# Altium PCB IR emitter.PcbDoc
Units mil, origin at the board's own origin, x right, y up, seen from the top; angles counter-clockwise.
Board outline 614.17 x 2563 mil, 2 copper layers (Top Layer, Bottom Layer); 32 components, 27 nets, 82 pads, 34 vias.
Unrouted connection lines stored in the file: 1.
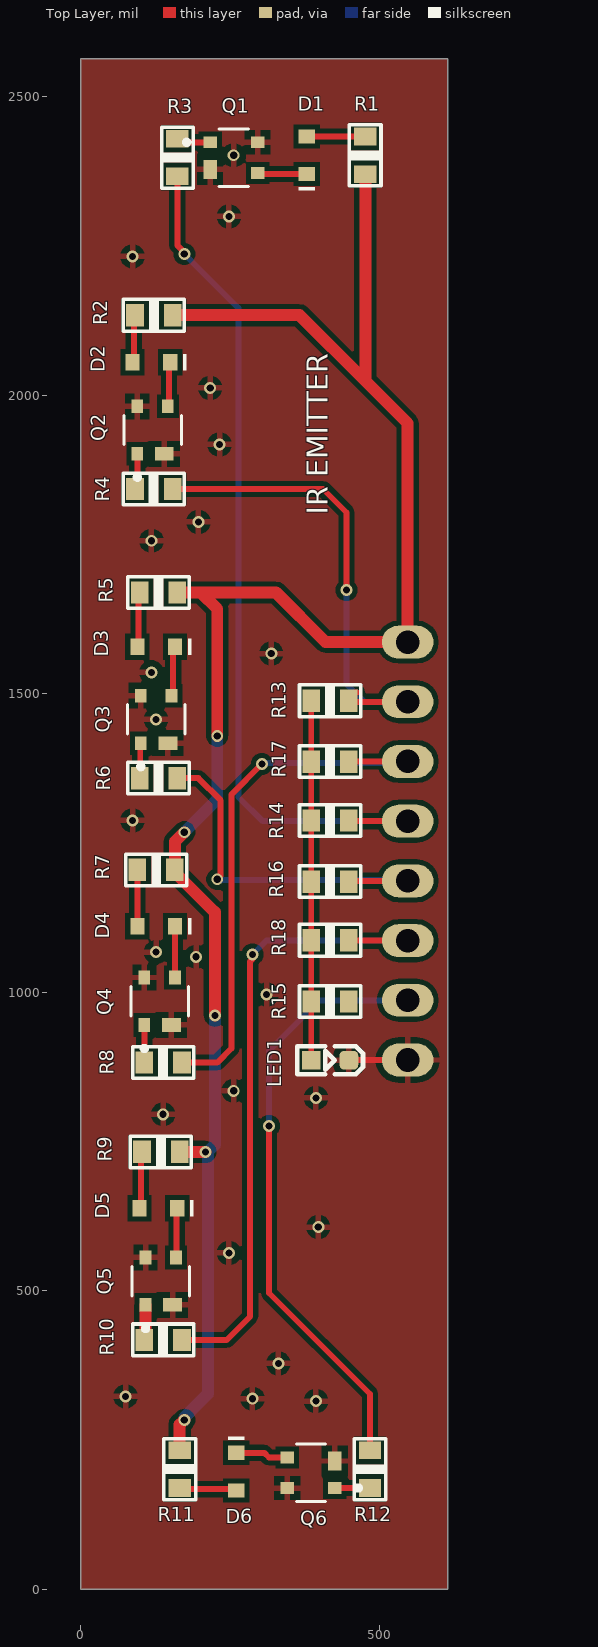
[diagram p0: Top Layer view]
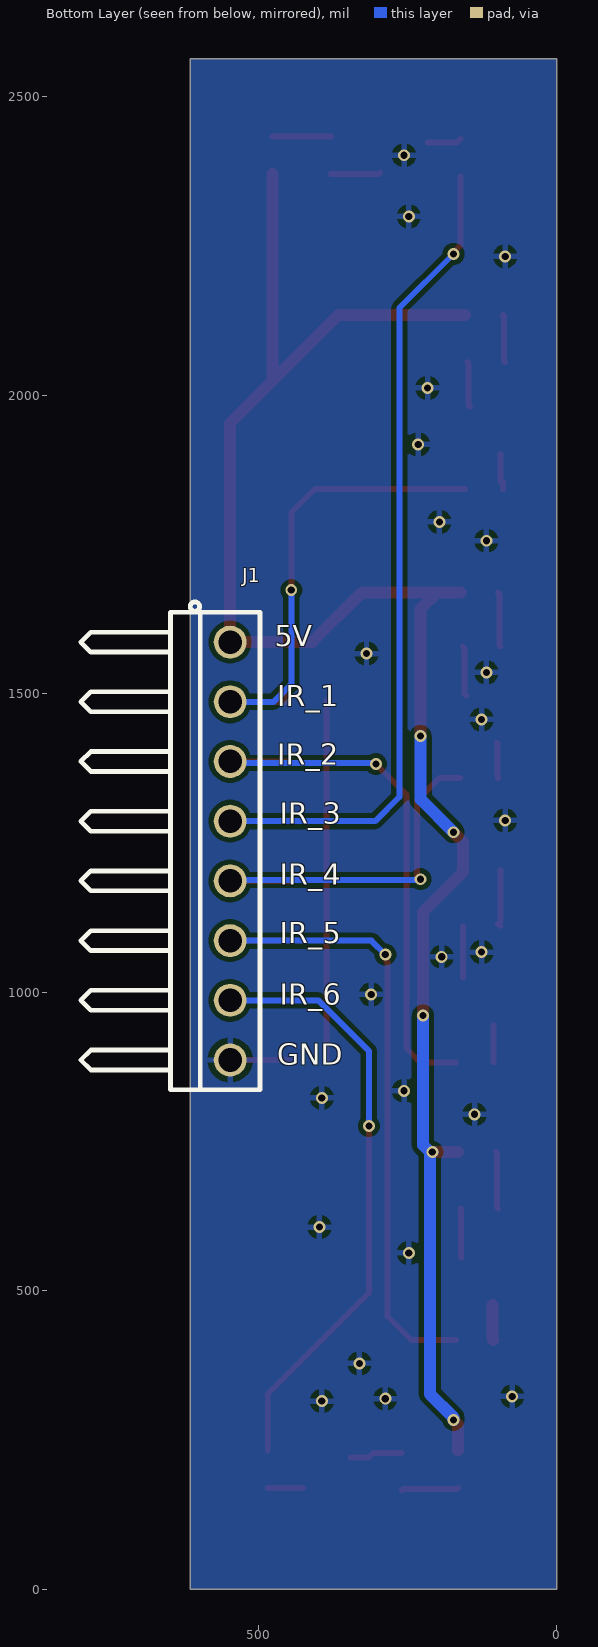
[diagram p1: Bottom Layer view, seen from below]

## Layer stack, top to bottom
Top Solder: solder mask 0.4, Solder Resist, Dk 3.5
Top Layer: signal copper 1.4
Dielectric 1: dielectric 12.6, FR-4, Dk 4.8
Bottom Layer: signal copper 1.4
Bottom Solder: solder mask 0.4, Solder Resist, Dk 3.5

## Board outline
0,0 614.17,0 614.17,2563 0,2563

## Design rules (kind name [scope] priority, off if disabled: settings)
Clearance [All] p1: gap=8 ignorepadtopadclearanceinfootprint=TRUE
PolygonConnect [All] p1: connectstyle=Relief reliefconductorwidth=10 reliefentries=4 polygonreliefangle="90 Angle" airgapwidth=10
RoutingVias [All] p1: holewidth=12 width=20 viastyle="Through Hole" minholewidth=12 minwidth=20 maxholewidth=12 maxwidth=20
SolderMaskExpansion [All] p1: expansion=4 istentingtop=FALSE
Width [All] p1: maxlimit=50 minlimit=8 preferedwidth=10
30 further rules are at their usual default settings.

## Components (designator, comment, footprint, x,y, rotation, side; value= is the part's Value field where it differs from the comment)
D1 "15406094BA400A" WL-SICW_0603_L1.6W0.8H0.88 377.95,2401.57 r90 top
D2 "15406094BA400A" WL-SICW_0603_L1.6W0.8H0.88 118.11,2055.12 r180 top
D3 "15406094BA400A" WL-SICW_0603_L1.6W0.8H0.88 125.98,1578.74 r180 top
D4 "15406094BA400A" WL-SICW_0603_L1.6W0.8H0.88 125.98,1110.24 r180 top
D5 "15406094BA400A" WL-SICW_0603_L1.6W0.8H0.88 129.92,637.8 r180 top
D6 "15406094BA400A" WL-SICW_0603_L1.6W0.8H0.88 259.84,196.85 r270 top
J1 "HDR1X8" HDRR_M_1X8 547.24,1236.22 r270 bottom value=HDRM8
LED1 "LED SMD 0603 GREEN" LED_0603_GREEN 417.32,885.83 r0 top
Q1 "BFP540" TRANS_BFP540 256.3,2397.64 r0 top
Q2 "BFP540" TRANS_BFP540 120.08,1941.34 r90 top
Q3 "BFP540" TRANS_BFP540 125.98,1456.69 r90 top
Q4 "BFP540" TRANS_BFP540 131.89,984.65 r90 top
Q5 "BFP540" TRANS_BFP540 133.86,515.75 r90 top
Q6 "BFP540" TRANS_BFP540 385.43,194.88 r180 top
R1 "220R" "RES 0603_1608" 476.38,2401.57 r90 top value=1K
R2 "220R" "RES 0603_1608" 122.05,2133.86 r180 top value=1K
R3 "10K" "RES 0603_1608" 161.42,2397.64 r270 top value=1K
R4 "10K" "RES 0603_1608" 122.05,1842.52 r0 top value=1K
R5 "220R" "RES 0603_1608" 129.92,1669.29 r180 top value=1K
R6 "10K" "RES 0603_1608" 129.92,1358.27 r0 top value=1K
R7 "220R" "RES 0603_1608" 125.98,1204.72 r180 top value=1K
R8 "10K" "RES 0603_1608" 137.8,881.89 r0 top value=1K
R9 "220R" "RES 0603_1608" 133.86,732.28 r180 top value=1K
R10 "10K" "RES 0603_1608" 137.8,417.32 r0 top value=1K
R11 "220R" "RES 0603_1608" 165.35,200.79 r270 top value=1K
R12 "10K" "RES 0603_1608" 484.25,200.79 r90 top value=1K
R13 "220R" "RES 0603_1608" 417.32,1488.19 r180 top value=1K
R14 "220R" "RES 0603_1608" 417.32,1287.4 r180 top value=1K
R15 "220R" "RES 0603_1608" 417.32,984.25 r0 top value=1K
R16 "220R" "RES 0603_1608" 417.32,1185.04 r0 top value=1K
R17 "220R" "RES 0603_1608" 417.32,1385.83 r0 top value=1K
R18 "220R" "RES 0603_1608" 417.32,1086.61 r0 top value=1K

## Footprints (in the part's own frame and the unit in brackets; to place one, negate y for a bottom-side part, rotate by r counter-clockwise, add the part's x,y. Pads: shape width x height; smd on the part's side, far side on the other; paste and mask are expansions set on the pad)
HDRR_M_1X8 [mm] "Connector; Header; 8 Position"
  round 1.4 / inner round 1.4 / far side oval 1.4x2.2 hole 1 mask+0.1: 1(-8.89,0) 2(-6.35,0) 3(-3.81,0) 4(-1.27,0) 5(1.27,0) 6(3.81,0) 7(6.35,0) 8(8.89,0)
  silkscreen extent -10.6,-6.35 10.16,1.27, body extent -10.03,-7.37 10.29,1.27, height 5.45
LED_0603_GREEN [mm] "LED SMD 0603, GREEN"
  rect 0.8x0.8 smd mask+0.075: 1(-0.8,0)
  rrect50% 0.8x0.8 smd mask+0.075: 2(0.8,0)
  silkscreen extent -1.4,-0.6 1.4,0.6, body extent -0.8,-0.4 0.8,0.4, height 0.5
"RES 0603_1608" [mm] "Chip Resistor, 2-Leads, Body 1.60x0.80mm, IPC Medium Density"
  rect 0.75x0.95 smd: 1(-0.8,0) 2(0.8,0)
  silkscreen extent -1.3,-0.67 1.3,0.68, body extent -0.8,-0.4 0.8,0.4, height 0.45
TRANS_BFP540 [mm]
  rect 0.58x0.5 smd: 1(-1.01,0.65) 3(1.01,-0.65) 4(1.01,0.65)
  rect 0.58x0.8 smd: 2(-1.01,-0.5)
  silkscreen extent -2.11,-1.22 0.63,1.22, body extent -1,-1.05 1,1.05, height 1
WL-SICW_0603_L1.6W0.8H0.88 [mm] "SMT Infrared Chip LED Waterclear, body 1.6x0.8mm"
  rect 0.6x0.7 smd: 1(-0.8,0) 2(0.8,0)
  silkscreen extent -1.5,-0.35 -1.35,0.35, body extent -0.8,-0.4 0.8,0.4, height 0.88

## Part data
D1 D2 D3 D4 D5 D6: library part CMP-03913-108242140-1, "15406094BA400A Ir Emitter, 940Nm, 0603 Rohs Compliant: Yes", Forward Current=700mA, Forward Voltage=1.2V, Max Operating Temperature=85°C, Max Reverse Voltage (DC)=5V, Min Operating Temperature=-40°C, Height=900µm, Length=1.6mm, NexarPartId=108242140, Peak Wavelength=940nm, RoHS=Compliant, Viewing Angle=140°, Width=800µm
J1: library part HDRR_M_1X8, "CONN, HEADER, RightAngle, Male, pitch: 2.54mm, 8POS"
Q1 Q2 Q3 Q4 Q5 Q6: "RF Transistor NPN 5V 80mA 30GHz 250mW Surface Mount PG-SOT343-4", Package="SOT-343 Infineon", Availability="In Stock", Check_prices=https://www.snapeda.com/parts/BFP540/Infineon/view-part/?ref=eda, MF=Infineon, MP=BFP540, Price=None, Purchase-URL=https://pricing.snapeda.com/search/part/BFP540/?ref=eda, SnapEDA_Link=https://www.snapeda.com/parts/BFP540/Infineon/view-part/?ref=snap
R1 R2 R3 R4 R5 R6 R7 R8 R9 R10 R11 R12 R13 R14 R15 R16 R17 R18: library part "Res 0603", "SMT Resistor"

## Via types
v1: diameter 20, hole 12, Top Layer to Bottom Layer, 34 vias

## Nets (pads, with @x,y where several pads share a name; then routed paths per layer and width w, separated by ;. In a path a pad name is that pad's centre, name@x,y a point inside that pad or via, vN(x,y) a via of type N, cw(c..) or ccw(c..) an arc to the next point about the centre after c; other vN are vias at no path point)
+5: J1.1 R1.1 R2.1 R5.1 R7.1 R9.1 R11.1 | length 3179.1
  Top Layer w20: R2.1 366.14,2133.86 476.38,2023.62 ; R5.1 200.79,1669.29 ; R11.1 165.35,275.59 v1(173.23,283.46) ; R9.1 v1(208.66,732.28) ; v1(173.23,1267.72) 157.48,1251.97 R7.1 157.48,1200.79 224.41,1133.86 v1(224.41,960.63) ; v1(228.35,1429.13) 228.35,1641.73 200.79,1669.29 ; R1.1 476.38,2023.62 ; 200.79,1669.29 326.77,1669.29 409.45,1586.61 546.85,1586.61 J1.1 547.24,1952.76 476.38,2023.62
  Bottom Layer w20: v1(173.23,283.46) 173.23,287.4 212.6,326.77 v1@212.6,732.28 ; v1(173.23,1267.72) 228.35,1322.83 v1(228.35,1429.13) ; v1(208.66,732.28) v1@212.6,732.28 ; v1(224.41,960.63) 224.41,744.09 v1@212.6,732.28
GND: J1.8 LED1.2 Q1.2 Q1.4 Q2.2 Q2.4 Q3.2 Q3.4 Q4.2 Q4.4 Q5.2 Q5.4 Q6.2 Q6.4 | length 98.6
  Top Layer w10: LED1.2 449.02,886.02 547.05,886.02 J1.8
  other v1: 393.7,314.96 287.4,318.9 74.8,322.83 330.71,377.95 248.03,562.99 397.64,606.3 137.8,795.28 393.7,822.83 255.91,834.65 311.02,996.06 192.91,1059.06 125.98,1066.93 86.61,1287.4 125.98,1456.69 118.11,1535.43 318.9,1566.93 118.11,1755.91 196.85,1787.4 232.28,1917.32 216.54,2011.81 86.61,2232.28 248.03,2299.21 255.91,2401.57
IR1: J1.2 R4.2 R13.1 | length 830.6
  Top Layer w10: R4.2 405.51,1842.52 444.88,1803.15 v1(444.88,1673.23) ; R13.1@462.52,1501.89 458.58,1501.89 448.82,1492.13 R13.1 450.79,1486.22 J1.2
  Bottom Layer w10: v1(444.88,1673.23) 444.88,1515.75 474.41,1486.22 J1.2
IR2: J1.3 R8.2 R17.2 | length 934.5
  Top Layer w10: R8.2 228.35,881.89 251.97,905.51 251.97,1330.71 v1(303.15,1381.89) ; R17.2 449.21,1386.22 J1.3
  Bottom Layer w10: v1(303.15,1381.89) 305.06,1383.8 544.83,1383.8 J1.3
IR3: J1.4 R3.2 R14.1 | length 1486.5
  Top Layer w10: R3.2 161.42,2250.74 173.23,2238.93 v1(173.23,2236.22) ; R14.1 450,1286.22 533.86,1286.22 540.55,1279.53 J1.4
  Bottom Layer w10: v1(173.23,2236.22) 263.78,2145.67 263.78,1326.77 304.33,1286.22 J1.4
IR4: J1.5 R6.2 R16.2 | length 641.4
  Top Layer w10: R6.2 196.85,1358.27 233.97,1321.15 233.97,1194.6 v1(228.35,1188.98) ; R16.2 450,1186.22 J1.5
  Bottom Layer w10: v1(228.35,1188.98) 229.72,1187.6 545.87,1187.6 J1.5
IR5: J1.6 R10.2 R18.2 | length 1106.5
  Top Layer w10: R10.2 244.09,417.32 283.46,456.69 283.46,1051.18 287.4,1055.12 v1(287.4,1062.99) ; R18.2 449.21,1086.22 J1.6
  Bottom Layer w10: v1(287.4,1062.99) 310.63,1086.22 J1.6
IR6: J1.7 R12.2 R15.2 | length 1006.8
  Top Layer w10: v1(314.96,775.59) 314.96,496.06 484.25,326.77 R12.2
  Bottom Layer w10: v1(314.96,775.59) 314.96,901.57 399.61,986.22 J1.7
NetD1_1: D1.1 Q1.3 | length 82.7
  Top Layer w10: Q1.3 298.03,2370.08 D1.1
NetD1_2: D1.2 R1.2 | length 98.4
  Top Layer w10: D1.2 R1.2
NetD2_1: D2.1 Q2.3 | length 75.6
  Top Layer w10: Q2.3 147.64,1983.07 147.64,2053.15 D2.1
NetD2_2: D2.2 R2.2 | length 80.4
  Top Layer w10: D2.2 88.58,2057.09 88.58,2131.89 R2.2
NetD3_1: D3.1 Q3.3 | length 84.7
  Top Layer w10: Q3.3 154.53,1499.41 154.53,1575.79 D3.1
NetD3_2: D3.2 R5.2 | length 92.2
  Top Layer w10: D3.2 96.46,1580.71 96.46,1667.32 R5.2
NetD4_1: D4.1 Q4.3 | length 85.8
  Top Layer w10: Q4.3 D4.1
NetD4_2: D4.2 R7.2 | length 97.7
  Top Layer w10: D4.2 98.43,1114.17 94.49,1118.11 R7.2
NetD5_1: D5.1 Q5.3 | length 83.1
  Top Layer w10: Q5.3 160.43,556.5 160.43,636.81 D5.1
NetD5_2: D5.2 R9.2 | length 96.1
  Top Layer w10: D5.2 100.39,639.76 100.39,730.32 R9.2
NetD6_1: D6.1 Q6.3 | length 89.1
  Top Layer w10: D6.1 307.09,228.35 314.96,220.47 Q6.3
NetD6_2: D6.2 R11.2 | length 96.1
  Top Layer w10: R11.2 167.32,167.32 257.87,167.32 D6.2
NetLED1_1: LED1.1 R13.2 R14.2 R15.1 R16.1 R17.1 R18.1 | length 602.4
  Top Layer w10: LED1.1 R15.1 R18.1 R16.1 R14.2 R13.2
NetQ1_1: Q1.1 R3.1 | length 57.6
  Top Layer w10: R3.1 167.32,2423.23 Q1.1
NetQ2_1: Q2.1 R4.1 | length 61.9
  Top Layer w10: R4.1 90.55,1854.33 92.6,1854.33 94.49,1856.22 Q2.1
NetQ3_1: Q3.1 R6.1 | length 59.5
  Top Layer w10: R6.1 99.41,1359.25 99.41,1415.94 Q3.1
NetQ4_1: Q4.1 R8.1 | length 63
  Top Layer w10: R8.1 Q4.1
NetQ5_1: Q5.1 R10.1 | length 59.5
  Top Layer w20: R10.1 108.11,419.13 108.11,475.83 Q5.1
NetQ6_1: Q6.1 R12.1 | length 59.1
  Top Layer w10: Q6.1 R12.1

## Polygon pours and split planes (outlines as drawn)
GND on Top Layer "GND_L01_P000" (solid, remove dead copper, pour order 0): 0,0 614.17,0 614.17,2563 0,2563
GND on Bottom Layer "GND_L02_P001" (solid, remove dead copper, pour order 1): 0,0 614.17,0 614.17,2563 0,2563

## Silkscreen, mask and mechanical layers (free items; w line width, h text height)
Top Overlay:
  text "IR EMITTER" at 425.2,1799.21 h60 r90
Bottom Overlay:
  text "5V" at 472.44,1567.65 h60
  text "IR_1" at 468.5,1467.29 h60
  text "IR_2" at 468.5,1368.87 h60
  text "IR_3" at 464.57,1270.44 h60
  text "IR_4" at 464.57,1168.08 h60
  text "IR_5" at 464.57,1069.66 h60
  text "IR_6" at 464.57,967.29 h60
  text "GND" at 468.5,866.86 h60